# Altium PCB PCB2.PcbDoc
Units mm, origin at the board's own origin, x right, y up, seen from the top; angles counter-clockwise.
Board outline 33 x 55 mm, 2 copper layers (Top Layer, Bottom Layer), stack 1.569 mm thick; 4 components, 0 nets, 8 pads, 4 vias.
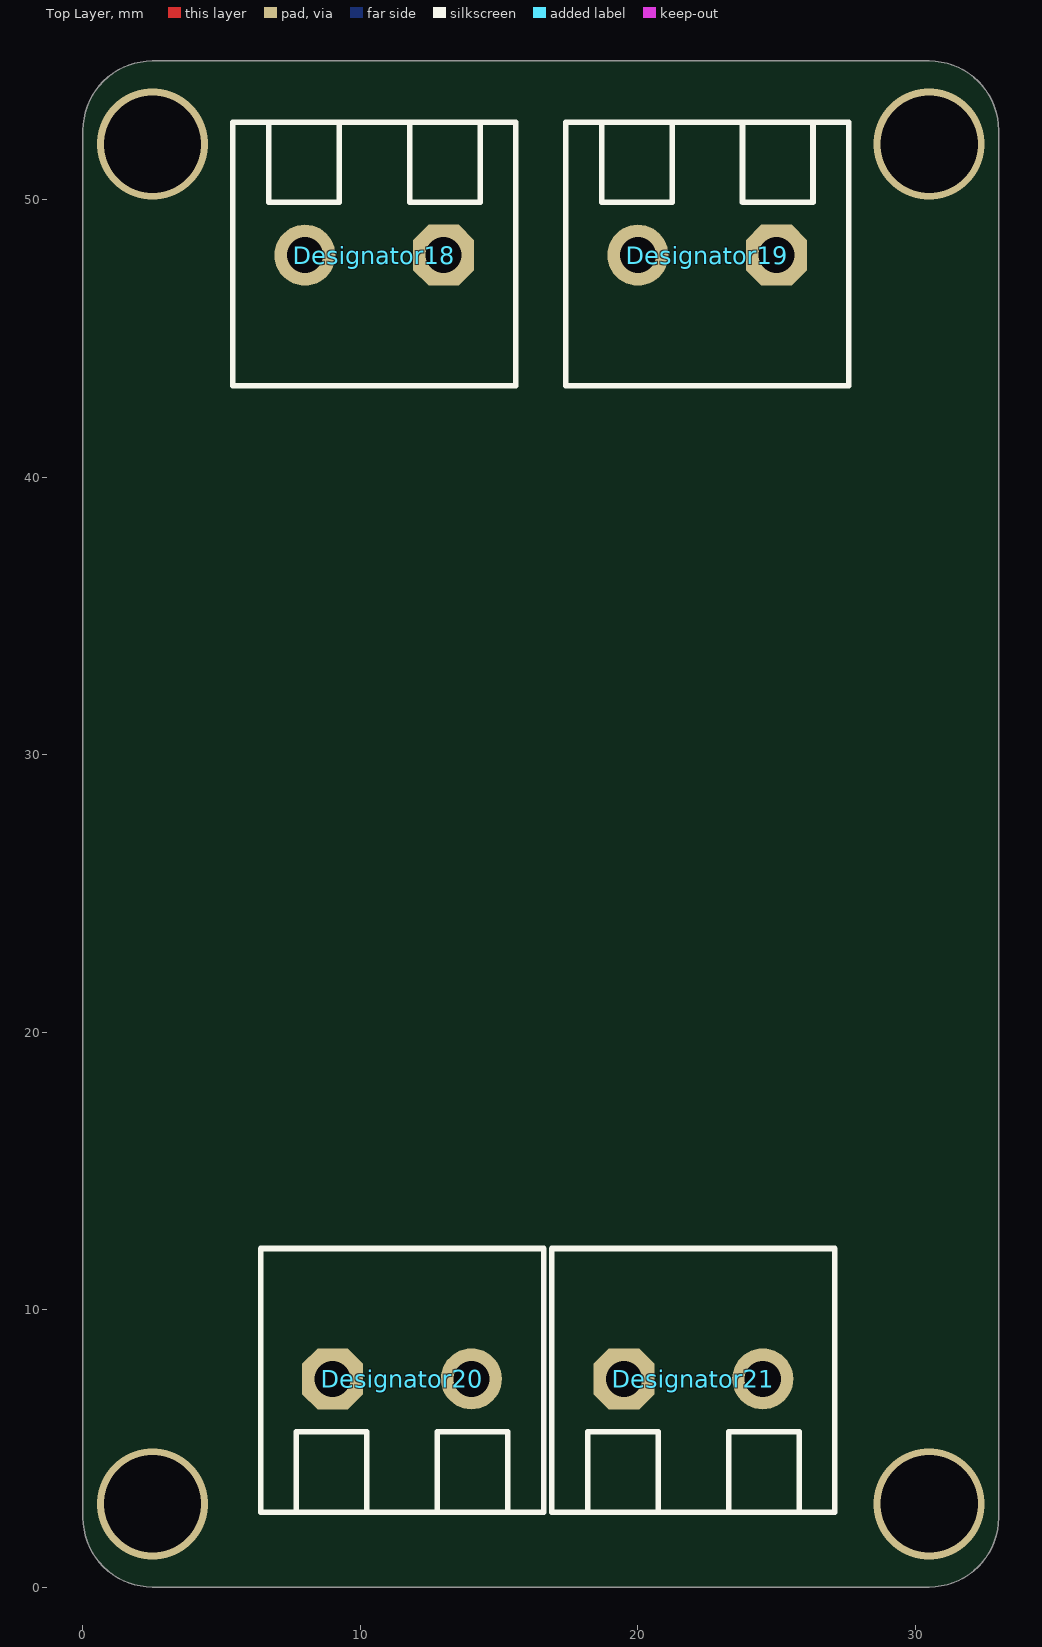
[diagram p0: Top Layer view]
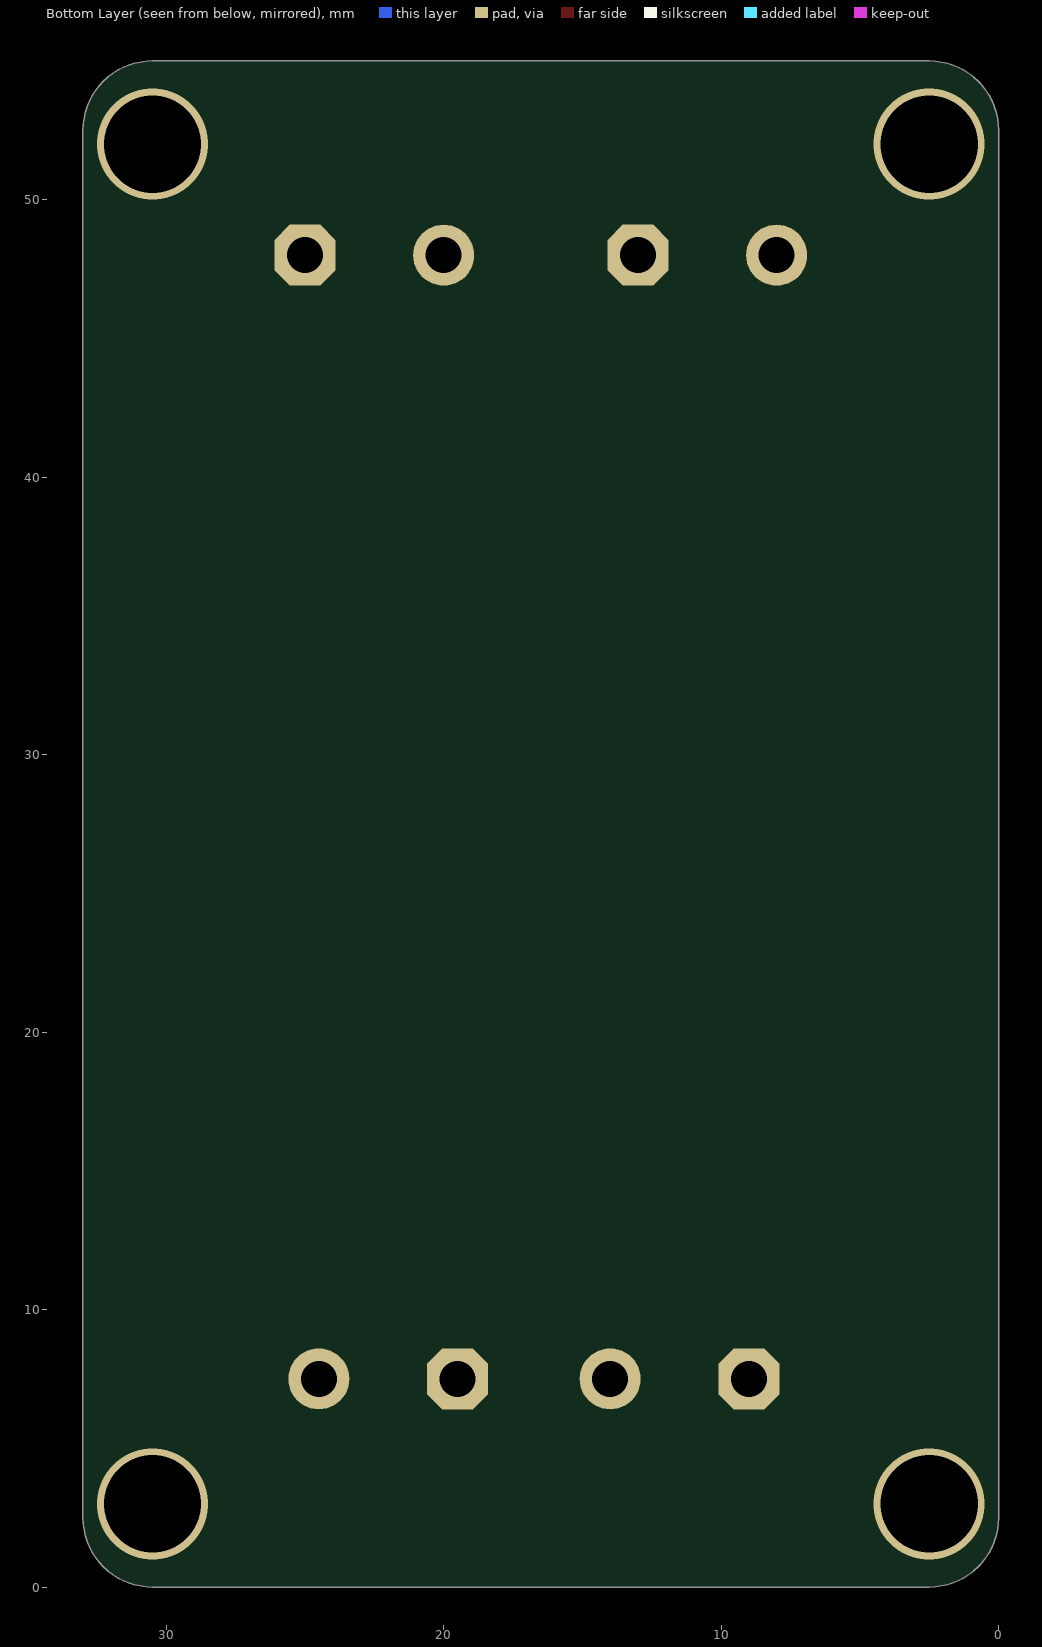
[diagram p1: Bottom Layer view, seen from below]

## Layer stack, top to bottom
Top Solder: solder mask 0.0254, SM-001, Dk 4
Top Layer: signal copper 0.035
Dielectric 1: core 1.4986, Core-043, Dk 4.3
Bottom Layer: signal copper 0.035
Bottom Solder: solder mask 0.0254, SM-001, Dk 4

## Board outline
0,2.5 0,52.5 cw(c2.5,52.5) 2.5,55 30.5,55 cw(c30.5,52.5) 33,52.5 33,2.5 cw(c30.5,2.5) 30.5,0 2.5,0 cw(c2.5,2.5)

## Design rules (kind name [scope] priority, off if disabled: settings)
Clearance [All] p1: gap=0.254 ignorepadtopadclearanceinfootprint=FALSE except(0: Arc-Hole Track-Hole SMDPad-Hole THPad-Hole Via-Hole Fill-Hole Poly-Hole Region-Hole Text-Hole)
PolygonConnect [All] p1: connectstyle=Relief reliefconductorwidth=0.254 reliefentries=4 polygonreliefangle="90 Angle" airgapwidth=0.254
RoutingVias [All] p1: holewidth=0.711 width=1.27 viastyle="Through Hole" minholewidth=0.711 minwidth=1.27 maxholewidth=0.711 maxwidth=1.27
SolderMaskExpansion [All] p1: expansion=0.102 istentingtop=FALSE
Width [All] p1: maxlimit=0.254 minlimit=0.254 preferedwidth=0.254
30 further rules are at their usual default settings.

## Components (designator, comment, footprint, x,y, rotation, side; value= is the part's Value field where it differs from the comment)
Designator18 "Comment" "CON: 0395430002 (5 mm)" 10.5,48 r180 top
Designator19 "Comment" "CON: 0395430002 (5 mm)" 22.5,48 r180 top
Designator20 "Comment" "CON: 0395430002 (5 mm)" 11.5,7.5 r0 top
Designator21 "Comment" "CON: 0395430002 (5 mm)" 22,7.5 r0 top

## Footprints (in the part's own frame and the unit in brackets; to place one, negate y for a bottom-side part, rotate by r counter-clockwise, add the part's x,y. Pads: shape width x height; smd on the part's side, far side on the other; paste and mask are expansions set on the pad)
"CON: 0395430002 (5 mm)" [mm] "2 pin 5.08mm screw connector"
  oct 2.2x2.2 hole 1.3: 1(-2.5,0)
  round 2.2 hole 1.3: 2(2.5,0)
  silkscreen extent -5.1,-4.8 5.1,4.7, body extent -5,-4.8 5,4.6, height 14.63

## Via types
v1: diameter 4, hole 3.5, Top Layer to Bottom Layer, 4 vias

## Nets (pads, with @x,y where several pads share a name; then routed paths per layer and width w, separated by ;. In a path a pad name is that pad's centre, name@x,y a point inside that pad or via, vN(x,y) a via of type N, cw(c..) or ccw(c..) an arc to the next point about the centre after c; other vN are vias at no path point)
pads on no net: Designator18.1 Designator18.2 Designator19.1 Designator19.2 Designator20.1 Designator20.2 Designator21.1 Designator21.2
copper on no net:
  other v1: 2.5,3 30.5,3 2.5,52 30.5,52

## Silkscreen, mask and mechanical layers (free items; w line width, h text height)
Border:
  the board outline again, w0.1